# Altium PCB BLDC_PCBV3.PcbDoc
Units mm, origin at the board's own origin, x right, y up, seen from the top; angles counter-clockwise.
Board outline 160 x 68 mm, 2 copper layers (Top Layer, Bottom Layer); 52 components, 31 nets, 129 pads, 11 vias.
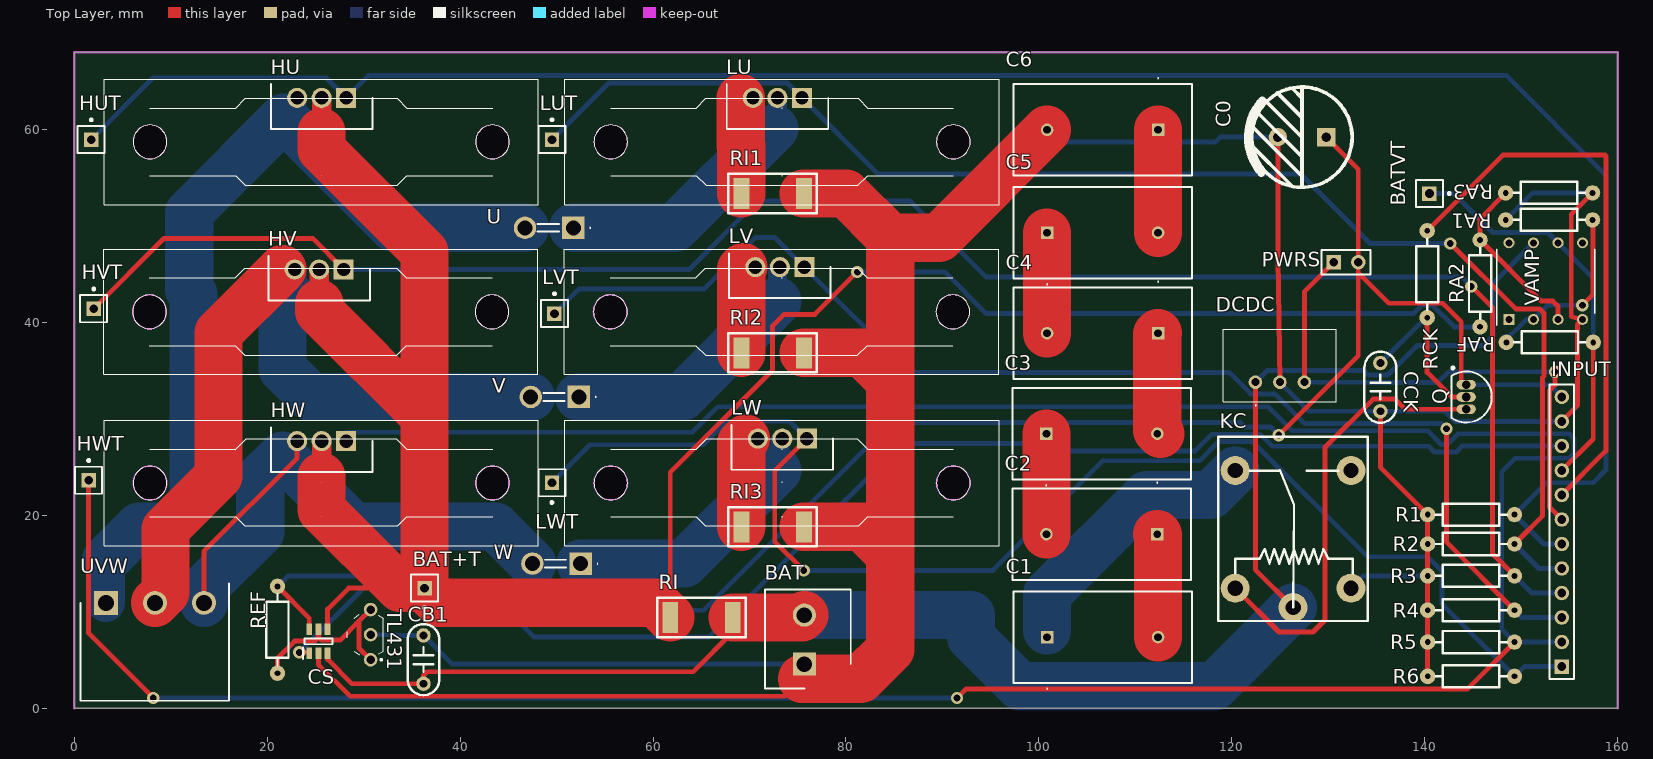
[diagram p0: Top Layer view]
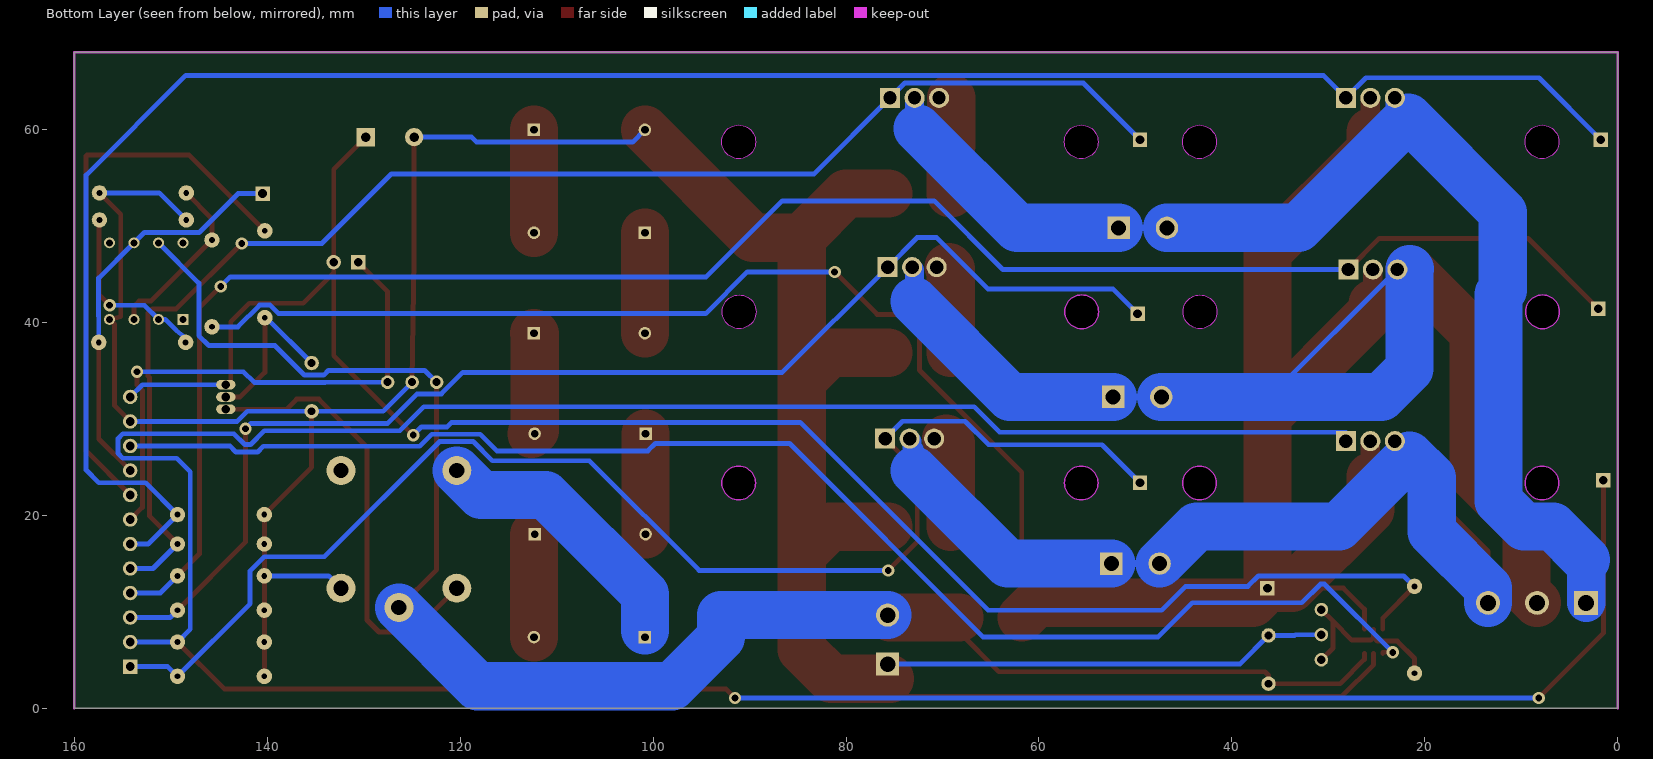
[diagram p1: Bottom Layer view, seen from below]
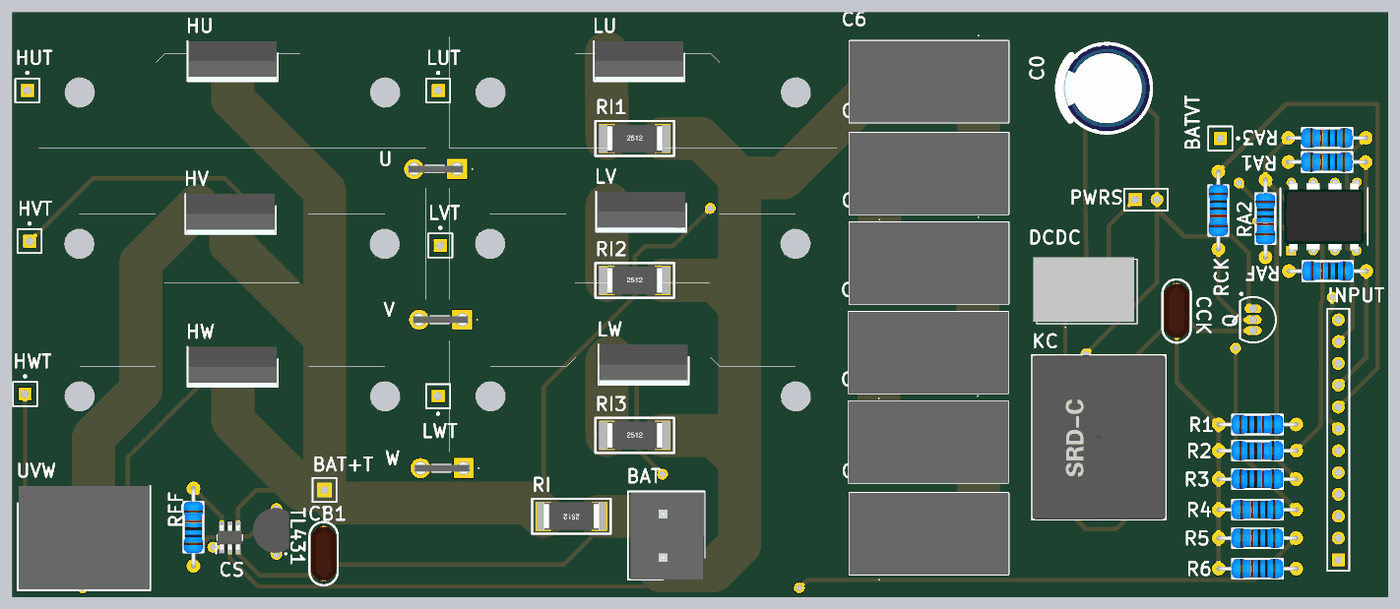
[diagram p2: 3D render of the assembled board from above, using the file's embedded part models]

## Layer stack, top to bottom
Top Solder: solder mask 0.0102, Solder Resist, Dk 3.5
Top Layer: signal copper 0.0356
Dielectric 1: dielectric 0.32, FR-4, Dk 4.8
Bottom Layer: signal copper 0.0356
Bottom Solder: solder mask 0.0102, Solder Resist, Dk 3.5

## Board outline
0,0 160,0 160,68 0,68
cut-out: 91.12,56.945 ccw(c91.12,58.695) 92.87,58.695 ccw(c91.12,58.695) 91.12,60.445 ccw(c91.12,58.695) 89.37,58.695 ccw(c91.12,58.695)
cut-out: 57.37,23.342 cw(c55.62,23.342) 55.62,21.592 cw(c55.62,23.342) 53.87,23.342 cw(c55.62,23.342) 55.62,25.092 cw(c55.62,23.342)
cut-out: 57.32,41.085 cw(c55.57,41.085) 55.57,39.335 cw(c55.57,41.085) 53.82,41.085 cw(c55.57,41.085) 55.57,42.835 cw(c55.57,41.085)
cut-out: 55.62,56.945 ccw(c55.62,58.695) 57.37,58.695 ccw(c55.62,58.695) 55.62,60.445 ccw(c55.62,58.695) 53.87,58.695 ccw(c55.62,58.695)
cut-out: 92.87,23.342 cw(c91.12,23.342) 91.12,21.592 cw(c91.12,23.342) 89.37,23.342 cw(c91.12,23.342) 91.12,25.092 cw(c91.12,23.342)
cut-out: 91.07,39.335 ccw(c91.07,41.085) 92.82,41.085 ccw(c91.07,41.085) 91.07,42.835 ccw(c91.07,41.085) 89.32,41.085 ccw(c91.07,41.085)
cut-out: 43.318,39.335 ccw(c43.318,41.085) 45.068,41.085 ccw(c43.318,41.085) 43.318,42.835 ccw(c43.318,41.085) 41.568,41.085 ccw(c43.318,41.085)
cut-out: 45.118,23.342 cw(c43.368,23.342) 43.368,21.592 cw(c43.368,23.342) 41.618,23.342 cw(c43.368,23.342) 43.368,25.092 cw(c43.368,23.342)
cut-out: 7.868,56.945 ccw(c7.868,58.695) 9.618,58.695 ccw(c7.868,58.695) 7.868,60.445 ccw(c7.868,58.695) 6.118,58.695 ccw(c7.868,58.695)
cut-out: 9.568,41.085 cw(c7.818,41.085) 7.818,39.335 cw(c7.818,41.085) 6.068,41.085 cw(c7.818,41.085) 7.818,42.835 cw(c7.818,41.085)
cut-out: 9.618,23.342 cw(c7.868,23.342) 7.868,21.592 cw(c7.868,23.342) 6.118,23.342 cw(c7.868,23.342) 7.868,25.092 cw(c7.868,23.342)
cut-out: 43.368,56.945 ccw(c43.368,58.695) 45.118,58.695 ccw(c43.368,58.695) 43.368,60.445 ccw(c43.368,58.695) 41.618,58.695 ccw(c43.368,58.695)

## Design rules (kind name [scope] priority, off if disabled: settings)
Clearance [All] p1: gap=0.254 ignorepadtopadclearanceinfootprint=FALSE
PolygonConnect [All] p1: connectstyle=Relief reliefconductorwidth=0.254 reliefentries=4 polygonreliefangle="90 Angle" airgapwidth=0.254
RoutingVias [All] p1: holewidth=0.711 width=1.27 viastyle="Through Hole" minholewidth=0.711 minwidth=1.27 maxholewidth=0.711 maxwidth=1.27
SolderMaskExpansion [All] p1: expansion=0.102 istentingtop=FALSE
Width [All] p1: maxlimit=5 minlimit=0.25 preferedwidth=0.5
30 further rules are at their usual default settings.

## Components (designator, comment, footprint, x,y, rotation, side; value= is the part's Value field where it differs from the comment)
BAT "1757242" SHDR2W100P0X508_1X2_1016X860X1250P 75.692,4.572 r90 top
BAT+T "Test" PIN1 36.322,12.446 r180 top
BATVT "Test" PIN1 140.462,53.34 r270 top
C0 "Cap Pol1" "CAP 5.0*10*12.5" 127.254,59.182 r180 top value=100pF
C1 "SCMR22H155PSBB0" SCMR22H155PSBB0 100.838,7.366 r90 top
C2 "SCMR22H155PSBB0" SCMR22H155PSBB0 112.268,18.034 r270 top
C3 "SCMR22H155PSBB0" SCMR22H155PSBB0 100.768,28.448 r90 top
C4 "SCMR22H155PSBB0" SCMR22H155PSBB0 112.338,38.862 r270 top
C5 "SCMR22H155PSBB0" SCMR22H155PSBB0 100.838,49.276 r90 top
C6 "SCMR22H155PSBB0" SCMR22H155PSBB0 112.338,59.944 r270 top
CB1 "Cap" "CBB 6.3*6.3*5" 36.214,5.04 r90 top value=47UF
CCK "Cap" "CBB 6.3*6.3*5" 135.382,33.274 r270 top value=100pF
CS "INA181A4QDBVRQ1" SOT95P280X145-6N 25.324,6.93 r90 top
DCDC "TSR_1-2450E" TSR12450E 122.428,33.782 r0 top
HU "IRL530" TO254P465X1024X2050-3P 28.194,63.246 r180 top
HUT "Test" PIN1 1.778,58.928 r0 top
HV "IRL530" TO254P465X1024X2050-3P 27.94,45.466 r180 top
HVT "Test" PIN1 2.032,41.402 r0 top
HW "IRL530" TO254P465X1024X2050-3P 28.194,27.686 r180 top
HWT "Test" PIN1 1.511,23.622 r0 top
INPUT "Header 12" HDR1X12 154.178,4.318 r90 top
KC "Relay-SPDT" SRD-C_BK 120.334,12.438 r90 top
LU "IRL530" TO254P465X1024X2050-3P 75.438,63.246 r180 top
LUT "Test" PIN1 49.53,58.928 r0 top
LV "IRL530" TO254P465X1024X2050-3P 75.692,45.72 r180 top
LVT "Test" PIN1 49.784,40.894 r0 top
LW "IRL530" TO254P465X1024X2050-3P 75.946,27.94 r180 top
LWT "Test" PIN1 49.53,23.368 r180 top
PWRS "Header 2" HDR1X2 130.556,46.228 r0 top
Q "NPN" TO-226-AA 144.272,32.258 r180 top
R1 "Res2" "RS 1/4W" 144.78,20.066 r0 top value=2.2K
R2 "Res2" "RS 1/4W" 144.78,17.018 r0 top value=2.2K
R3 "Res2" "RS 1/4W" 144.78,13.716 r0 top value=2.2K
R4 "Res2" "RS 1/4W" 144.78,10.16 r180 top value=2.2K
R5 "Res2" "RS 1/4W" 144.78,6.858 r180 top value=2.2K
R6 "Res2" "RS 1/4W" 144.78,3.302 r180 top value=2.2K
RA1 "Res2" "RS 1/4W" 152.868,50.602 r180 top value=100K
RA2 "Res2" "RS 1/4W" 145.708,44.022 r270 top value=100K
RA3 "Res2" "RS 1/4W" 152.868,53.402 r180 top value=10K
RAF "Res2" "RS 1/4W" 152.938,37.912 r180 top value=10K
RCK "Res2" "RS 1/4W" 140.228,44.972 r270 top value=1K
REF "Res2" "RS 1/4W" 21.082,8.128 r90 top value=250
RI "Res2" "R 2512" 65.024,9.398 r180 top value=0.01
RI1 "Res2" "R 2512" 72.39,53.34 r0 top value=0.01ohm
RI2 "Res2" "R 2512" 72.39,36.83 r0 top value=0.01ohm
RI3 "Res2" "R 2512" 72.39,18.796 r0 top value=0.01ohm
TL431 "TL431ACLPR" TL431ACLPR 30.734,5.02 r90 top
U "2376595-2" 23765952 51.736,49.784 r180 top
UVW "1785955" SHDRRA3W103P0X508_1X3_1524X1200X872P 3.302,10.922 r180 top
V "2376595-2" 23765952 52.324,32.258 r180 top
VAMP "OPA445AP" DIP794W53P254L959H508Q8N 152.518,44.262 r90 top
W "2376595-2" 23765952 52.498,14.986 r180 top

## Footprints (in the part's own frame and the unit in brackets; to place one, negate y for a bottom-side part, rotate by r counter-clockwise, add the part's x,y. Pads: shape width x height; smd on the part's side, far side on the other; paste and mask are expansions set on the pad)
23765952 [mm]
  rect 2.325x2.325 hole 1.55: 1(0,0)
  round 2.325 hole 1.55: 1(5,0)
  silkscreen extent -1.8,-0.4 3.7,0.4, body extent -0.67,-0.67 5.68,0.67, height 10.75
"CAP 5.0*10*12.5" [mm] "脚距5mm直径10mm高度12.5mm"
  rect 1.9x1.9 hole 1: 1(-2.5,0)
  round 1.9 hole 1: 2(2.5,0)
  silkscreen extent -5.2,-5.21 5.64,5.2, body extent -5,-5.01 5.01,4.99, height 12.55
"CBB 6.3*6.3*5" [mm] "脚距5mm高6.3mm厚3mm"
  round 1.5 hole 0.8: 1(-2.5,0) 2(2.5,0)
  silkscreen extent -3.68,-1.65 3.68,1.65, body extent -3.15,-1.5 3.15,1.5, height 6.8
DIP794W53P254L959H508Q8N [mm]
  rect 1.13x1.13 hole 0.73: 1(-3.97,3.81)
  round 1.13 hole 0.73: 2(-3.97,1.27) 3(-3.97,-1.27) 4(-3.97,-3.81) 5(3.97,-3.81) 6(3.97,-1.27) 7(3.97,1.27) 8(3.97,3.81)
  silkscreen extent -4.54,-5.08 3.3,5.08, body extent -4.1,-4.64 4.1,4.64, height 4.21
HDR1X2 [mm] "Connector; Header; 2 Position"
  rect 1.5x1.5 hole 0.9: 1(0,0)
  round 1.5 hole 0.9: 2(2.54,0)
  silkscreen extent -1.27,-1.27 3.81,1.27
HDR1X12 [mm] "Connector; Header; 12 Position"
  rect 1.5x1.5 hole 0.9: 1(0,0)
  round 1.5 hole 0.9: 2(2.54,0) 3(5.08,0) 4(7.62,0) 5(10.16,0) 6(12.7,0) 7(15.24,0) 8(17.78,0) 9(20.32,0) 10(22.86,0) 11(25.4,0) 12(27.94,0)
  silkscreen extent -1.27,-1.27 29.21,1.27
PIN1 [mm] "Connector; Plug"
  rect 1.5x1.5 hole 0.9: 1(0,0)
  silkscreen extent -1.4,-1.4 1.4,2.17
"R 2512" [mm] "1W贴片电阻"
  rect 1.65x3.2 smd: 1(-3.24,0) 2(3.24,0)
  silkscreen extent -4.57,-2.03 4.57,2.03, body extent -3.2,-1.6 3.2,1.6, height 0.55
"RS 1/4W" [mm] "直插色环电阻，脚距9mm，直径2.3mm"
  round 1.6 hole 0.6: 1(-4.5,0) 2(4.5,0)
  silkscreen extent -3.68,-1.14 3.68,1.14, body extent -4.72,-1.16 4.73,1.16, height 2.32
SCMR22H155PSBB0 [mm]
  rect 1.3x1.3 hole 0.8: 1(0,0)
  round 1.3 hole 0.8: 2(0,-11.5)
  silkscreen extent -5.4,-15 4.75,3.5, body extent -4.75,-15 4.75,3.5, height 26.1
SHDR2W100P0X508_1X2_1016X860X1250P [mm]
  rect 2.4x2.4 hole 1.6: 1(0,0)
  round 2.4 hole 1.6: 2(5.08,0)
  silkscreen extent -2.54,-4.8 7.72,4.1, body extent -2.54,-4.8 7.62,3.8, height 12.5
SHDRRA3W103P0X508_1X3_1524X1200X872P [mm]
  rect 2.475x2.475 hole 1.65: 1(0,0)
  round 2.475 hole 1.65: 2(-5.08,0) 3(-10.16,0)
  silkscreen extent -12.75,-2 2.64,10.15, body extent -12.7,-2 2.54,10, height 8.72
SOT95P280X145-6N [mm]
  rect 1.2x0.6 smd: 1(-1.25,0.95) 2(-1.25,0) 3(-1.25,-0.95) 4(1.25,-0.95) 5(1.25,0) 6(1.25,0.95)
  silkscreen extent -1.85,-1.45 0.3,1.6, body extent -1.4,-1.45 1.4,1.45, height 1.2
SRD-C_BK [mm] "单刀双投"
  round 3 hole 1.6: 1(0,0) 2(0,-12) 3(-2,-6) 4(12.2,0) 5(12.2,-12)
  silkscreen extent -3.4,-13.75 15.7,1.75, body extent -3.4,-13.75 15.7,1.75, height 15.6
TL431ACLPR [mm]
  round 1.4 hole 0.9: 1(0,0) 2(2.6,0) 3(5.2,0)
  silkscreen extent -0.1,-1.3 4.7,2.4, body extent 0.13,-1.46 5.33,2.73, height 5.35
TO254P465X1024X2050-3P [mm]
  rect 2.085x2.085 hole 1.39: 1(0,0)
  round 2.085 hole 1.39: 2(2.54,0) 3(5.08,0)
  silkscreen extent -2.72,-1.42 7.8,3.22, body extent -2.58,-1.43 7.66,3.22, height 18.77
TO-226-AA [mm] "TO, Flat Index; 3 In-Line, Axial Leads; Body Dia. 4.8mm; Leads 0.55 x 0.51 mm (max)"
  oval 2x1 hole 0.9: 1(0,-1.27) 2(0,0) 3(0,1.27)
  silkscreen extent -2.65,-3.13 1.52,2.65, body extent -2.65,-2.66 1.52,2.66, height 5.33
TSR12450E [mm]
  round 1.4 hole 0.83: 1(0,0) 2(2.54,0) 3(5.08,0)
  silkscreen extent -3.32,-2.45 8.38,5.5, body extent -3.69,-1.78 7.99,5.72, height 9.88

## Part data
BAT: library part OQ025A000000G, "Connector", Manufacturer_Name=Amphenol, Mouser Part Number=523-OQ025A000000G, Datasheet Link=https://media.digikey.com/pdf/Data%20Sheets/Amphenol%20PDFs/OQxx5A00xxxxG.pdf, Height=12.5mm, Manufacturer_Part_Number=OQ025A000000G, Mouser Price/Stock=https://www.mouser.co.uk/ProductDetail/Amphenol-Anytek/OQ025A000000G?qs=T3oQrply3y%2FPbDIhJzFZ1w%3D%3D
BAT+T BATVT HUT HVT HWT LUT LVT LWT U V W: library part Socket, "Socket", LatestRevisionDate=17-Jul-2002, LatestRevisionNote="Re-released for DXP Platform.", Publisher="Altium Limited"
C0: "Polarized Capacitor (Radial)", LatestRevisionDate=17-Jul-2002, LatestRevisionNote="Re-released for DXP Platform.", PackageDescription="Polarized Capacitor (Radial); 2 Leads", PackageReference=RB7.6-15, Published=8-Jun-2000, Publisher="Altium Limited"
C1 C2 C3 C4 C5 C6: "Capacitor Polarised", Manufacturer_Name=AVX, Mouser Part Number=581-SCMR22H155PSBB0, Arrow Part Number=SCMR22H155PSBB0, Arrow Price/Stock=https://www.arrow.com/en/products/scmr22h155psbb0/avx, Datasheet Link=https://datasheets.avx.com/AVX-SCM.pdf, Height=26mm, Manufacturer_Part_Number=SCMR22H155PSBB0, Mouser Price/Stock=https://www.mouser.com/Search/Refine.aspx?Keyword=581-SCMR22H155PSBB0
CB1 CCK: "Capacitor", LatestRevisionDate=17-Jul-2002, LatestRevisionNote="Re-released for DXP Platform.", PackageDescription="Radial Cap, Thru-Hole; 2 Leads; 0.3 in Pin Spacing", PackageReference=RAD-0.3, Published=8-Jun-2000, Publisher="Altium Limited"
CS: "Integrated Circuit", Manufacturer_Name="Texas Instruments", Mouser Part Number=595-INA181A4QDBVRQ1, Arrow Part Number=INA181A4QDBVRQ1, Arrow Price/Stock=https://www.arrow.com/en/products/ina181a4qdbvrq1/texas-instruments?region=nac, Datasheet Link=http://www.ti.com/lit/gpn/INA181-Q1, Height=1.45mm, Manufacturer_Part_Number=INA181A4QDBVRQ1, Mouser Price/Stock=https://www.mouser.co.uk/ProductDetail/Texas-Instruments/INA181A4QDBVRQ1?qs=9r4v7xj2Lnnq9cNkmpf%2FZg%3D%3D
DCDC: "Power Supply", Manufacturer_Name="Traco Power", Manufacturer_Part_Number="TSR 1-2450E", Mouser Part Number=495-TSR1-2450E, Datasheet Link=https://tracopower.com/tsr1e-datasheet/, Height=10.6mm, Mouser Price/Stock=https://www.mouser.co.uk/ProductDetail/TRACO-Power/TSR-1-2450E?qs=vmHwEFxEFR%2FlQnbAtEoeVA%3D%3D
HU HV HW LU LV LW: "MOSFET (N-Channel)", Manufacturer_Name=Vishay, Mouser Part Number=844-IRL530, Datasheet Link=https://mouser.componentsearchengine.com/Datasheets/1/IRL530.pdf, Height=4.65mm, Manufacturer_Part_Number=IRL530, Mouser Price/Stock=https://www.mouser.co.uk/ProductDetail/Vishay-Siliconix/IRL530?qs=ehM%252BESVsXgxZiUd3tW%2FRCg%3D%3D
INPUT: "Header, 12-Pin", LatestRevisionDate=17-Jul-2002, LatestRevisionNote="Re-released for DXP Platform.", Publisher="Altium Limited"
KC: "Single-Pole Dual-Throw Relay", LatestRevisionDate=17-Jul-2002, LatestRevisionNote="Re-released for DXP Platform.", PackageReference=MODULE5B, Published=24-Mar-1999, Publisher="Altium Limited"
PWRS: "Header, 2-Pin", LatestRevisionDate=17-Jul-2002, LatestRevisionNote="Re-released for DXP Platform.", Publisher="Altium Limited"
Q: "NPN Bipolar Transistor", Code_JEDEC=TO-226-AA, LatestRevisionDate=17-Jul-2002, LatestRevisionNote="Re-released for DXP Platform.", PackageDescription="TO, Flat Index; 3 In-Line, Axial Leads; Body Dia. 4.8mm; Leads 0.55 x 0.51 mm (max)", PackageReference=TO-226-AA, Published=8-Jun-2000, Publisher="Altium Limited"
R1 R2 R3 R4 R5 R6 RA1 RA2 RA3 RAF RCK REF RI RI1 RI2 RI3: "Resistor", LatestRevisionDate=17-Jul-2002, LatestRevisionNote="Re-released for DXP Platform.", PackageDescription="Axial Device, Thru-Hole; 2 Leads; 0.4 in Pin Spacing", PackageReference=AXIAL-0.4, Published=8-Jun-2000, Publisher="Altium Limited"
TL431: "Integrated Circuit", Manufacturer_Name="Texas Instruments", Mouser Part Number=595-TL431ACLPR, Arrow Part Number=TL431ACLPR, Arrow Price/Stock=https://www.arrow.com/en/products/tl431aclpr/texas-instruments?region=nac, Datasheet Link=http://www.ti.com/lit/gpn/tl431, Height=5.34mm, Manufacturer_Part_Number=TL431ACLPR, Mouser Price/Stock=https://www.mouser.co.uk/ProductDetail/Texas-Instruments/TL431ACLPR?qs=0le1rQK8zxqBxlVXkAYIwg%3D%3D
UVW: library part 1759020, "Connector", Manufacturer_Name="Phoenix Contact", Mouser Part Number=651-1759020, Arrow Part Number=1759020, Arrow Price/Stock=https://www.arrow.com/en/products/1759020/phoenix-contact, Datasheet Link=http://www.phoenixcontact.com/de/produkte/1759020/pdf, Height=8.72mm, Manufacturer_Part_Number=1759020, Mouser Price/Stock=https://www.mouser.co.uk/ProductDetail/Phoenix-Contact/1759020?qs=cyzODkzcbwBhDS9bIpwSxQ%3D%3D
VAMP: library part LM101AJG, "High Performance Operational Amplifier", ComponentAvailability=Obsolete, ComponentLink1Description="Manufacturer Link", ComponentLink1URL=http://www.ti.com/, ComponentLink2Description=Datasheet, ComponentLink2URL=http://focus.ti.com/lit/ds/slos061/slos061.pdf, ComponentLink3Description="Discontinuation Notice", ComponentLink3URL=http://focus.ti.com/pdfs/mltry/obsolete.pdf, DatasheetVersion=Sep-1990, LatestRevisionDate=04-Mar-2005, LatestRevisionNote="Stylized 3D Model Added.", PackageDescription="DIP; 8 Leads; Row Spacing 7.62 mm; Pitch 2.54 mm", PackageReference=JG008, PackageVersion=Jan-1995, Published=16-Jan-2001, Publisher="Altium Limited"

## Via types
v1: diameter 1.27, hole 0.711, Top Layer to Bottom Layer, 11 vias

## Nets (pads, with @x,y where several pads share a name; then routed paths per layer and width w, separated by ;. In a path a pad name is that pad's centre, name@x,y a point inside that pad or via, vN(x,y) a via of type N, cw(c..) or ccw(c..) an arc to the next point about the centre after c; other vN are vias at no path point)
BAT+: BAT.2 CB1.1 CS.3 DCDC.1 KC.3 RI.1 VAMP.7 | length 177.2
  Top Layer w0.5: CS.3 26.274,5.055 28.789,2.54 CB1.1 36.214,3.423 36.576,3.785 64.149,3.785 68.264,7.899 RI.1 ; DCDC.1 122.428,14.344 KC.3
  Top Layer w5: RI.1 75.438,9.398 BAT.2
  Bottom Layer w0.5: DCDC.1 123.647,35.001 133.656,35.001 134.137,34.52 136.12,34.52 139.192,37.592 146.05,37.592 147.066,38.608 147.066,44.05 VAMP.7
  Bottom Layer w5: BAT.2 92.964,9.652 92.964,7.366 98.044,2.286 118.182,2.286 KC.3
BAT-: BAT.1 C0.2 C6.2 CB1.2 CCK.2 CS.2 DCDC.2 INPUT.11 KC.2 R1.1 R2.1 R3.1 R4.2 R5.2 R6.2 RA1.2 RA3.1 RI1.2 RI2.2 RI3.2 TL431.2 VAMP.4 | length 362
  Top Layer w0.5: CS.2 25.324,4.521 28.6,1.245 73.635,1.245 75.438,3.048 75.692,3.048 BAT.1 ; C0.2 124.754,46.696 DCDC.2 ; CCK.2 135.382,24.964 R1.1 R2.1 R3.1 R4.2 R5.2 R6.2 ; INPUT.11 155.804,31.344 155.804,39.768 VAMP.4 155.16,40.58 155.16,51.194 RA3.1
  Top Layer w5: 75.438,3.048 81.534,3.048 84.582,6.096 84.582,15.867 ; RI3.2 81.653,18.796 84.582,15.867 ; RI2.2 81.653,36.83 84.582,33.901 ; RI1.2 80.01,53.34 84.582,48.768 ; C6.2 89.662,48.768 84.582,48.768 ; 84.582,15.867 84.582,33.901 ; 84.582,33.901 84.582,48.768
  Bottom Layer w0.5: TL431.2 33.426,7.62 33.506,7.54 CB1.2 39.182,4.572 BAT.1 ; C6.2 102.108,58.674 118.288,58.674 118.796,59.182 C0.2 ; DCDC.2 127.976,30.774 CCK.2 142.037,30.774 143.093,29.718 INPUT.11 ; KC.2 133.612,13.716 R3.1 ; RA1.2 151.168,53.402 RA3.1
CK: CCK.1 Q.2 RCK.2 | length 17.6
  Top Layer w0.5: RCK.2 140.228,34.803 142.773,32.258 Q.2
  Bottom Layer w0.5: CCK.1 140.08,40.472 RCK.2
CS: CS.1 INPUT.10 | length 147.5
  Top Layer w0.5: v1(23.343,5.791) 24.374,5.791 CS.1
  Bottom Layer w0.5: v1(23.343,5.791) 30.413,12.861 30.827,12.861 32.766,10.922 44.12,10.922 47.676,7.366 65.786,7.366 85.852,27.432 99.771,27.432 100.533,26.67 116.189,26.67 117.915,28.396 122.936,28.396 124.183,27.149 140.376,27.149 140.97,26.555 143.231,26.555 143.854,27.178 INPUT.10
CS2: BAT+T.1 CS.4 HU.2 HV.2 HW.2 RA2.2 RI.2 | length 248.9
  Top Layer w0.5: CS.4 26.274,10.272 28.448,12.446 BAT+T.1@35.941,12.446 ; RI.2 61.784,24.446 72.39,35.052 72.39,39.624 73.584,40.818 76.784,40.818 v1(81.178,45.212)
  Top Layer w2: 25.4,41.91 HV.2 ; 25.654,24.003 HW.2 ; 25.654,59.69 HU.2
  Top Layer w5: 25.4,41.91 25.4,41.148 36.322,30.226 ; 25.654,24.003 25.654,20.574 33.782,12.446 BAT+T.1 ; 25.654,59.69 25.654,57.912 36.322,47.244 36.322,30.226 ; RI.2 60.26,10.922 37.846,10.922 BAT+T.1 ; BAT+T.1 36.322,30.226
  Bottom Layer w0.5: v1(81.178,45.212) 90.219,45.212 94.537,40.894 138.806,40.894 139.688,41.776 140.768,41.776 143.022,39.522 RA2.2
NetBATVT_1: BATVT.1 INPUT.9 RAF.1 VAMP.6 | length 41.9
  Top Layer w0.5: INPUT.9 157.438,27.898 RAF.1
  Bottom Layer w0.5: BATVT.1 142.999,53.34 147.041,49.298 148.561,49.298 148.565,49.301 152.719,49.301 VAMP.6 157.451,44.569 157.451,40.619 157.438,40.606 RAF.1
NetC1_1: C1.1 KC.4 | length 29.2
  Bottom Layer w0.5: C1.1 100.838,8.048
  Bottom Layer w5: 100.838,8.048 100.838,11.799 111.137,22.098 117.794,22.098 KC.4
NetC1_2: C1.2 C2.1 | length 10.7
  Top Layer w5: C2.1 112.338,17.964 C1.2
NetC2_2: C2.2 C3.1 | length 10.4
  Top Layer w5: C2.2 C3.1
NetC3_2: C3.2 C4.1 | length 10.6
  Top Layer w5: C4.1 112.268,38.792 112.268,28.772 C3.2@112.592,28.448
NetC4_2: C4.2 C5.1 | length 10.4
  Top Layer w5: C4.2 C5.1
NetC5_2: C5.2 C6.1 | length 10.7
  Top Layer w5: C5.2 C6.1
NetCS_5: CS.5 REF.1 TL431.1 TL431.3 | length 18.8
  Top Layer w0.5: REF.1 21.082,5.183 22.86,6.961 24.919,6.961 25.324,7.366 ; CS.5 25.324,7.366 ; TL431.1 29.515,6.239 29.515,9.001 ; TL431.3 29.515,9.001 ; 25.324,7.366 25.629,7.061 27.575,7.061 29.515,9.001
NetHU_1: HU.1 HUT.1 INPUT.6 R1.2 | length 213.8
  Bottom Layer w0.5: HUT.1 8.179,65.329 26.111,65.329 HU.1 30.531,65.583 148.412,65.583 158.75,55.245 158.75,24.689 157.429,23.368 152.582,23.368 R1.2 152.328,17.018 INPUT.6
NetHV_1: HV.1 HVT.1 INPUT.4 R3.2 | length 191.2
  Top Layer w0.5: HVT.1 9.322,48.692 24.714,48.692 HV.1 ; v1(144.797,43.713) 147.015,41.496 147.015,15.981 R3.2
  Bottom Layer w0.5: HV.1 63.754,45.466 70.866,52.578 86.614,52.578 94.488,44.704 143.807,44.704 v1(144.797,43.713) ; R3.2 151.058,11.938 INPUT.4
NetHW_1: HW.1 HWT.1 INPUT.2 R5.1 | length 333.3
  Top Layer w0.5: HWT.1 1.511,7.76 v1(8.204,1.067) ; v1(91.516,1.067) 92.431,1.981 144.403,1.981 R5.1
  Bottom Layer w0.5: v1(8.204,1.067) v1(91.516,1.067) ; HW.1 28.194,28.6 64.084,28.6 66.726,31.242 123.745,31.242 126.234,28.753 140.284,28.753 141.707,27.33 142.316,27.33 143.434,28.448 154.94,28.448 155.448,27.94 155.448,26.416 154.94,25.908 149.352,25.908 147.955,24.511 147.955,8.183 R5.1 INPUT.2
NetINPUT_1: INPUT.1 LW.1 LWT.1 R6.1 | length 142.7
  Top Layer w0.5: v1(75.616,14.275) 72.619,17.272 72.619,24.613 LW.1
  Bottom Layer w0.5: LWT.1 53.467,27.305 65.227,27.305 67.665,29.743 74.143,29.743 LW.1 ; v1(75.616,14.275) 95.218,14.275 106.597,25.654 116.662,25.654 118.65,27.642 122.112,27.642 134.057,15.697 140.284,15.697 141.757,14.224 141.757,10.825 R6.1 150.296,4.318 INPUT.1
NetINPUT_3: INPUT.3 LV.1 LVT.1 R4.1 | length 130.8
  Top Layer w0.5: v1(142.24,28.956) 142.24,17.2 R4.1
  Bottom Layer w0.5: LVT.1 52.324,43.434 65.278,43.434 70.612,48.768 72.644,48.768 LV.1 86.614,34.798 119.709,34.798 121.929,32.578 124.445,32.578 127.508,29.515 141.681,29.515 v1(142.24,28.956) ; R4.1 150.042,9.398 INPUT.3
NetINPUT_5: INPUT.5 LU.1 LUT.1 R2.2 | length 146.2
  Top Layer w0.5: v1(142.621,48.158) 149.403,41.377 151.892,41.377 152.324,40.945 152.324,34.42 152.17,34.266 152.17,19.908 R2.2
  Bottom Layer w0.5: LUT.1 55.397,64.795 73.889,64.795 LU.1 83.312,55.372 127.102,55.372 134.315,48.158 v1(142.621,48.158) ; R2.2 151.82,14.478 INPUT.5
NetINPUT_8: INPUT.8 RCK.1 | length 58.9
  Top Layer w0.5: RCK.1 148.084,57.328 158.674,57.328 158.75,57.252 158.75,26.67 INPUT.8
NetKC_5: KC.1 Q.3 | length 46.7
  Top Layer w0.5: KC.1 124.873,7.899 128.397,7.899 129.642,9.144 129.642,27.051 134.62,32.029 136.931,32.029 137.973,30.988 Q.3
NetLU_3: LU.3 RI1.1 | length 11.2
  Top Layer w0.5: 69.102,63.246 LU.3
  Top Layer w5: 69.102,63.246 69.102,58.317 69.15,58.269 RI1.1
NetLV_3: LV.3 RI2.1 | length 10.2
  Top Layer w0.5: 69.356,45.72 LV.3
  Top Layer w5: RI2.1 69.15,45.515 69.356,45.72
NetLW_3: LW.3 RI3.1 | length 10.6
  Top Layer w0.5: 69.61,27.94 LW.3
  Top Layer w5: RI3.1 69.15,27.481 69.61,27.94
NetRA1_1: RA1.1 RAF.2 VAMP.2 | length 19
  Top Layer w0.5: v1(156.312,41.758) 157.404,42.85 157.404,49.748 RA1.1
  Bottom Layer w0.5: RAF.2 148.438,38.395 149.377,39.116 150.553,40.292 VAMP.2 152.714,41.758 v1(156.312,41.758)
NetRA2_1: RA2.1 RA3.2 VAMP.3 | length 18.3
  Top Layer w0.5: RA3.2 145.708,50.742 RA2.1 152.041,42.189 153.264,42.189 153.788,41.665 VAMP.3
UO: HU.3 LU.2 U.1 UVW.1 | length 126
  Bottom Layer w0.5: U.1@46.736,49.784 U.1@51.736,49.784 ; 72.555,60.074 72.555,60.417 72.898,60.417
  Bottom Layer w2: 21.742,61.181 23.098,62.536 23.098,63.23 HU.3 ; 72.898,60.417 LU.2
  Bottom Layer w4: UVW.1 3.302,15.394
  Bottom Layer w5: 3.302,15.394 6.739,18.831 9.736,18.831 12.378,21.473 12.378,42.904 11.938,43.344 11.938,51.377 21.742,61.181 33.139,49.784 U.1@46.736,49.784 ; U.1@51.736,49.784 62.265,49.784 72.555,60.074
VCC: C0.1 CS.6 INPUT.12 PWRS.2 Q.1 REF.2 | length 186
  Top Layer w0.5: REF.2 24.374,9.336 CS.6 ; v1(124.846,28.296) 133.096,36.546 133.096,45.11 ; C0.1 133.096,55.84 PWRS.2 133.096,45.11 ; Q.1 143.764,33.528 143.764,40.03 141.834,41.961 136.246,41.961 133.096,45.11
  Bottom Layer w0.5: REF.2 21.13,12.628 22.202,13.7 37.281,13.7 38.353,12.628 44.801,12.628 47.269,10.16 65.278,10.16 84.734,29.616 120.879,29.616 121.345,29.15 123.992,29.15 v1(124.846,28.296) ; Q.1 152.908,33.528 INPUT.12
VIN: DCDC.3 INPUT.7 PWRS.1 | length 56.2
  Top Layer w0.5: DCDC.3 127.508,43.18 PWRS.1 ; v1(153.467,34.874) 153.467,33.503 152.924,32.96 152.924,20.812 INPUT.7
  Bottom Layer w0.5: DCDC.3 133.96,33.782 133.976,33.766 141.335,33.766 142.443,34.874 v1(153.467,34.874)
VO: HV.3 LV.2 UVW.2 V.1 | length 140.6
  Top Layer w5: UVW.2 9.47,12.01 9.47,18.566 14.973,24.069 14.973,38.914 21.565,45.505
  Bottom Layer w0.5: HV.3 36.068,32.258 47.324,32.258 V.1@52.324,32.258
  Bottom Layer w2: 72.898,42.164 72.898,45.443 73.152,45.697 LV.2
  Bottom Layer w5: 21.565,45.505 21.604,45.466 21.604,35.187 24.532,32.258 V.1@47.324,32.258 ; V.1@52.324,32.258 62.992,32.258 72.898,42.164
WO: HW.3 LW.2 UVW.3 W.1 | length 102.8
  Top Layer w0.5: UVW.3 13.462,16.256 23.114,25.908 HW.3
  Bottom Layer w0.5: W.1@47.498,14.986 W.1@52.498,14.986
  Bottom Layer w2: 72.898,24.638 72.898,26.724 73.163,26.989 73.163,27.674 73.406,27.917 LW.2
  Bottom Layer w5: UVW.3 13.462,12.446 19.304,18.288 19.304,23.876 21.59,26.162 28.921,18.831 43.653,18.831 W.1@47.498,14.986 ; W.1@52.498,14.986 63.246,14.986 72.898,24.638
pads on no net: KC.5 VAMP.1 VAMP.5 VAMP.8

## Keep-outs
Keep-Out Layer:
  circle w0.013: c91.12,23.342 r1.75
  circle w0.013: c91.07,41.085 r1.75
  circle w0.013: c91.12,58.695 r1.75
  circle w0.013: c55.62,58.695 r1.75
  circle w0.013: c55.57,41.085 r1.75
  circle w0.013: c55.62,23.342 r1.75
  circle w0.013: c7.868,23.342 r1.75
  circle w0.013: c7.818,41.085 r1.75
  circle w0.013: c7.868,58.695 r1.75
  circle w0.013: c43.368,58.695 r1.75
  circle w0.013: c43.318,41.085 r1.75
  circle w0.013: c43.368,23.342 r1.75
  lines w0.254: 0,0 0,68 160,68 160,0

## Silkscreen, mask and mechanical layers (free items; w line width, h text height)
Top Overlay:
  circle w0.013: c91.12,23.342 r1.75
  circle w0.013: c91.07,41.085 r1.75
  circle w0.013: c91.12,58.695 r1.75
  circle w0.013: c55.62,58.695 r1.75
  circle w0.013: c55.57,41.085 r1.75
  circle w0.013: c55.62,23.342 r1.75
  circle w0.006: c73.37,23.425 r0.003
  circle w0.006: c73.37,19.842 r0.003
  circle w0.006: c73.32,37.585 r0.003
  circle w0.006: c73.37,55.195 r0.003
  circle w0.006: c73.37,26.842 r0.003
  circle w0.006: c73.32,44.585 r0.003
  circle w0.006: c73.37,62.195 r0.003
  circle w0.006: c73.37,19.842 r0.003
  circle w0.006: c73.37,26.842 r0.003
  circle w0.006: c73.32,37.585 r0.003
  circle w0.006: c73.32,44.585 r0.003
  circle w0.006: c73.37,55.195 r0.003
  circle w0.006: c73.37,62.195 r0.003
  circle w0.013: c91.12,23.342 r1.75
  circle w0.013: c91.07,41.085 r1.75
  circle w0.013: c91.12,58.695 r1.75
  circle w0.013: c55.62,58.695 r1.75
  circle w0.013: c55.57,41.085 r1.75
  circle w0.013: c55.62,23.342 r1.75
  circle w0.013: c7.868,23.342 r1.75
  circle w0.013: c7.818,41.085 r1.75
  circle w0.013: c7.868,58.695 r1.75
  circle w0.013: c43.368,58.695 r1.75
  circle w0.013: c43.318,41.085 r1.75
  circle w0.013: c43.368,23.342 r1.75
  circle w0.006: c25.618,62.195 r0.003
  circle w0.006: c25.618,55.195 r0.003
  circle w0.006: c25.618,26.842 r0.003
  circle w0.006: c25.618,19.842 r0.003
  circle w0.006: c25.618,62.195 r0.003
  circle w0.006: c25.618,26.842 r0.003
  circle w0.006: c25.618,55.195 r0.003
  circle w0.006: c25.618,19.842 r0.003
  circle w0.006: c25.618,23.425 r0.003
  circle w0.013: c7.868,23.342 r1.75
  circle w0.013: c7.818,41.085 r1.75
  circle w0.013: c7.868,58.695 r1.75
  circle w0.013: c43.368,58.695 r1.75
  circle w0.013: c43.318,41.085 r1.75
  circle w0.013: c43.368,23.342 r1.75
  lines w0.013: 7.818,37.585 16.693,37.585 17.699,36.579 33.436,36.579 34.443,37.585 43.318,37.585 ; 7.818,44.585 16.693,44.585 17.686,45.579 33.449,45.579 34.443,44.585 43.318,44.585 ; 7.868,19.842 16.743,19.842 17.665,18.919 33.57,18.919 34.493,19.842 43.368,19.842 ; 7.868,26.842 16.743,26.842 17.82,27.919 33.415,27.919 34.493,26.842 43.368,26.842 ; 7.868,55.195 16.743,55.195 17.749,54.189 33.486,54.189 34.493,55.195 43.368,55.195 ; 7.868,62.195 16.743,62.195 17.736,63.189 33.499,63.189 34.493,62.195 43.368,62.195 ; 55.57,37.585 64.445,37.585 65.451,36.579 81.188,36.579 82.195,37.585 91.07,37.585 ; 55.57,44.585 64.445,44.585 65.438,45.579 81.201,45.579 82.195,44.585 91.07,44.585 ; 55.62,19.842 64.495,19.842 65.417,18.919 81.322,18.919 82.245,19.842 91.12,19.842 ; 55.62,26.842 64.495,26.842 65.572,27.919 81.167,27.919 82.245,26.842 91.12,26.842 ; 55.62,55.195 64.495,55.195 65.501,54.189 81.238,54.189 82.245,55.195 91.12,55.195 ; 55.62,62.195 64.495,62.195 65.488,63.189 81.251,63.189 82.245,62.195 91.12,62.195 ; 3.068,34.585 48.068,34.585 48.068,47.585 3.068,47.585 3.068,34.585 ; 3.118,16.842 3.118,29.842 48.118,29.842 48.118,16.842 3.118,16.842 ; 3.118,52.195 3.118,65.195 48.118,65.195 48.118,52.195 3.118,52.195 ; 50.82,34.585 50.82,47.585 95.82,47.585 95.82,34.585 50.82,34.585 ; 50.87,16.842 95.87,16.842 95.87,29.842 50.87,29.842 50.87,16.842 ; 50.87,52.195 95.87,52.195 95.87,65.195 50.87,65.195 50.87,52.195